# EAGLE board PCB_Carte_Bracelet (EAGLE 9.6.2)
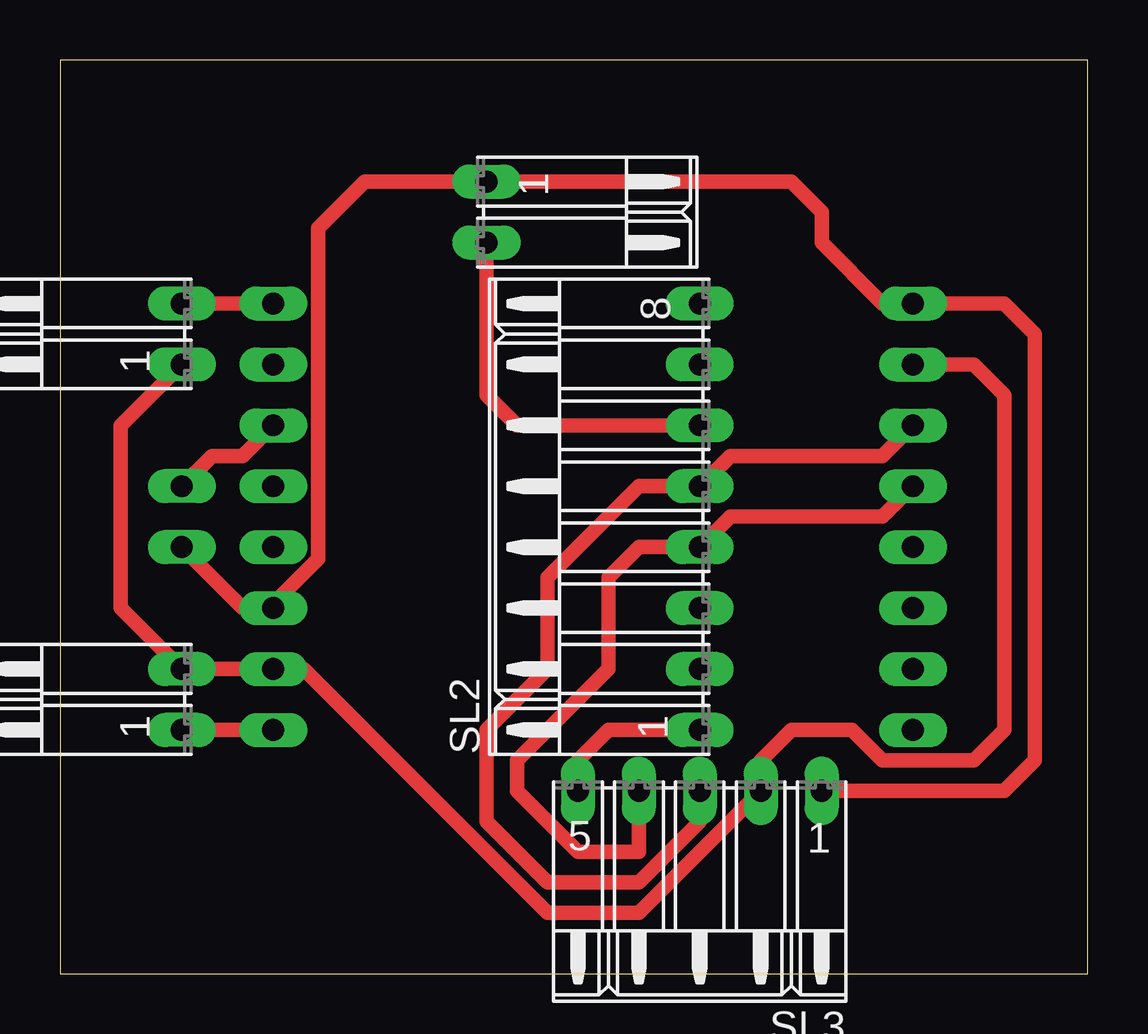
[diagram p0: board, top side]
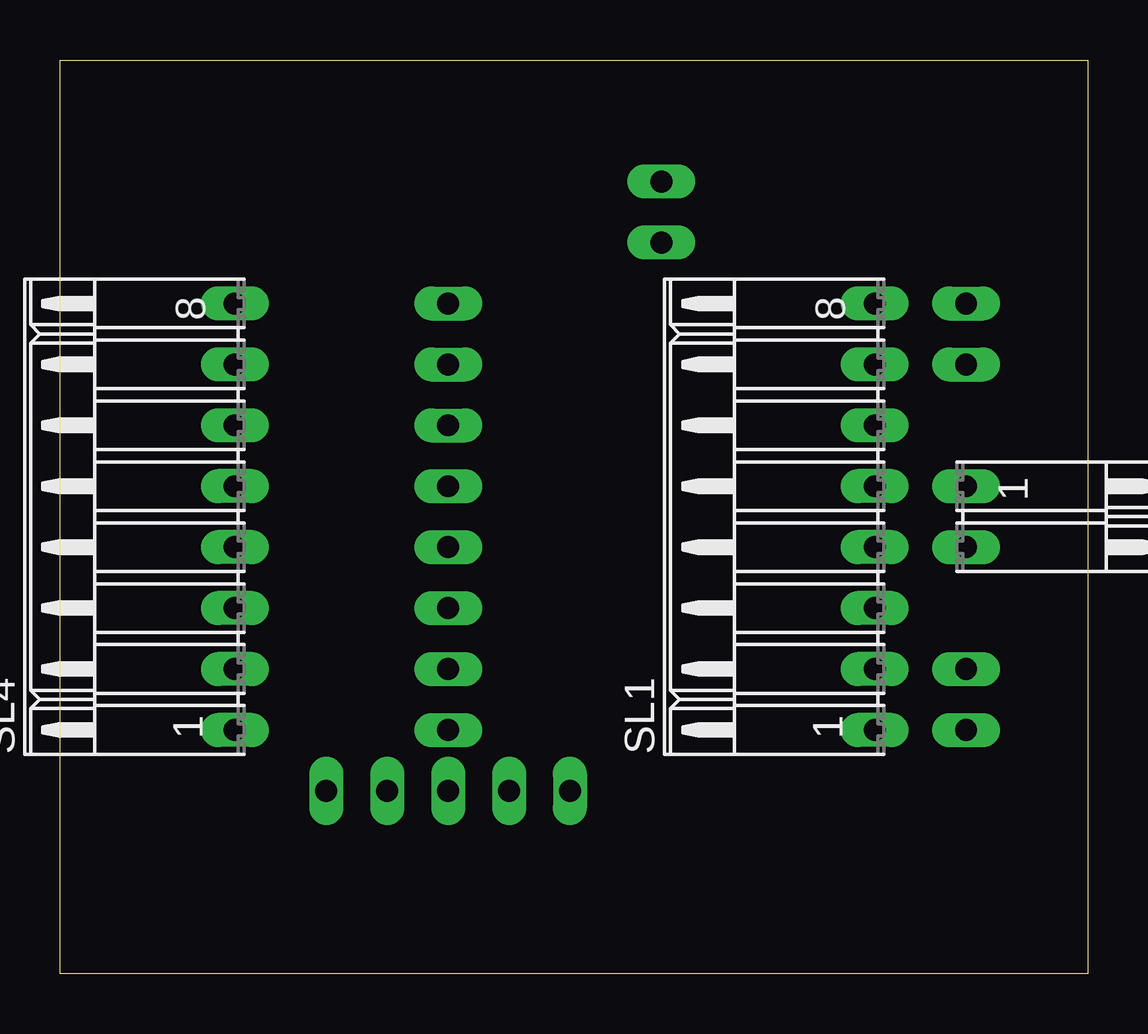
[diagram p1: board, bottom side, seen from below]

Size 42.85 x 38.09 mm. Coordinates in mm from the lower left corner, seen from the top.
Outline: 0,0 42.85,0 42.85,38.09 0,38.09 0,0
Copper layers (1*16): Top 0.035mm / dielectric 1.5mm / Bottom 0.035mm
Design rules "default": minimum track width 6mil, minimum drill 0.35mm, track to track 6mil, track to pad 6mil, pad to pad 6mil, via to via 6mil, smd to smd 6mil, copper to edge 40mil, drill to drill 6mil, minimum pad ring 10mil, minimum via ring 8mil, stop-mask expansion 4mil, vias tented up to drill 0mil, thermal gap 10mil

## Footprints (pad centres in the part's own frame; a part is rotated, then mirrored left to right if it is on the bottom)
08PA = drill 0.914 long: 1 -8.89,0; 2 -6.35,0; 3 -3.81,0; 4 -1.27,0; 5 1.27,0; 6 3.81,0; 7 6.35,0; 8 8.89,0
05PA = drill 0.914 long: 1 -5.08,0; 2 -2.54,0; 3 0,0; 4 2.54,0; 5 5.08,0
02PA = drill 0.914 long: 1 -1.27,0; 2 1.27,0

## Placement (x,y rotation side)
SL1  ESP32_LEFT  [08PA]  8.89,19.05 90 bottom
SL2  ESP32_RIGHT  [08PA]  26.67,19.05 90 top
SL3  MAX30102  [05PA]  26.67,7.62 180 top
SL4  MPU6050  [08PA]  35.56,19.05 90 bottom
SL5  BUZZER  [02PA]  5.08,19.05 270 bottom
SL9  ON_OFF_SWITCH  [02PA]  5.08,11.43 90 top
SL10  POWER_INPUT  [02PA]  17.78,31.75 270 top
SL11  POWER_INPUT  [02PA]  5.08,26.67 90 top

## Library data of the parts
SL1-SL5 SL9-SL11 = con-amp-quick; OC_FARNELL: unknown; OC_NEWARK: unknown

## Nets
LED: SL1.2 SL3.2 SL4.7 SL9.2 SL11.1
N$2: SL1.8 SL11.2
N$3: SL1.1 SL9.1
N$4: SL1.6 SL5.1
N$6: SL1.3 SL3.1 SL4.8 SL5.2 SL10.1
N$9: SL2.6 SL10.2
N$14: SL2.1 SL3.5
NC_MPU_XCL: SL2.5 SL3.3 SL4.6
NC_MPU_XDA: SL2.4 SL3.4 SL4.5

## Tracks (layer width: path | path; a pad name or v marks a point on that pad's centre or on a via)
LED
  Top 0.61: SL4.7 38.1,25.4 39.37,24.13 39.37,10.16 38.1,8.89 34.29,8.89 33.02,10.16 30.48,10.16 29.21,8.89 SL3.2 24.13,2.54 20.32,2.54 10.16,12.7 SL1.2 SL9.2 2.54,15.24 2.54,22.86 SL11.1
N$2
  Top 0.61: SL11.2 SL1.8
N$3
  Top 0.61: SL1.1 SL9.1
N$4
  Top 0.61: SL5.1 6.35,21.59 7.62,21.59 SL1.6
N$6
  Top 0.61: SL5.2 7.62,15.24 SL1.3 8.89,15.42 10.77,17.3 10.77,31.09 12.7,33.02 SL10.1 30.48,33.02 31.75,31.75 31.75,30.48 34.29,27.94 SL4.8 39.37,27.94 40.64,26.67 40.64,8.89 39.37,7.62 SL3.1
N$9
  Top 0.61: SL10.2 17.78,24.13 19.05,22.86 SL2.6
N$14
  Top 0.61: SL2.1 22.86,10.16 21.59,8.89 SL3.5
NC_MPU_XCL
  Top 0.61: SL4.6 34.29,21.59 27.94,21.59 SL2.5 24.13,20.32 20.32,16.51 20.32,12.7 17.78,10.16 17.78,6.35 20.32,3.81 24.13,3.81 26.67,6.35 SL3.3
NC_MPU_XDA
  Top 0.61: SL4.5 34.29,19.05 27.94,19.05 SL2.4 24.13,17.78 22.86,16.51 22.86,12.7 19.05,8.89 19.05,7.62 21.59,5.08 24.13,5.08 SL3.4